# Altium PCB imu_2by2.PcbDoc
Units mil, origin at the board's own origin, x right, y up, seen from the top; angles counter-clockwise.
Board outline 2000 x 2000 mil, 2 copper layers (Top Layer, Bottom Layer); 231 components, 130 nets, 771 pads, 48 vias.
Unrouted connection lines stored in the file: 502.
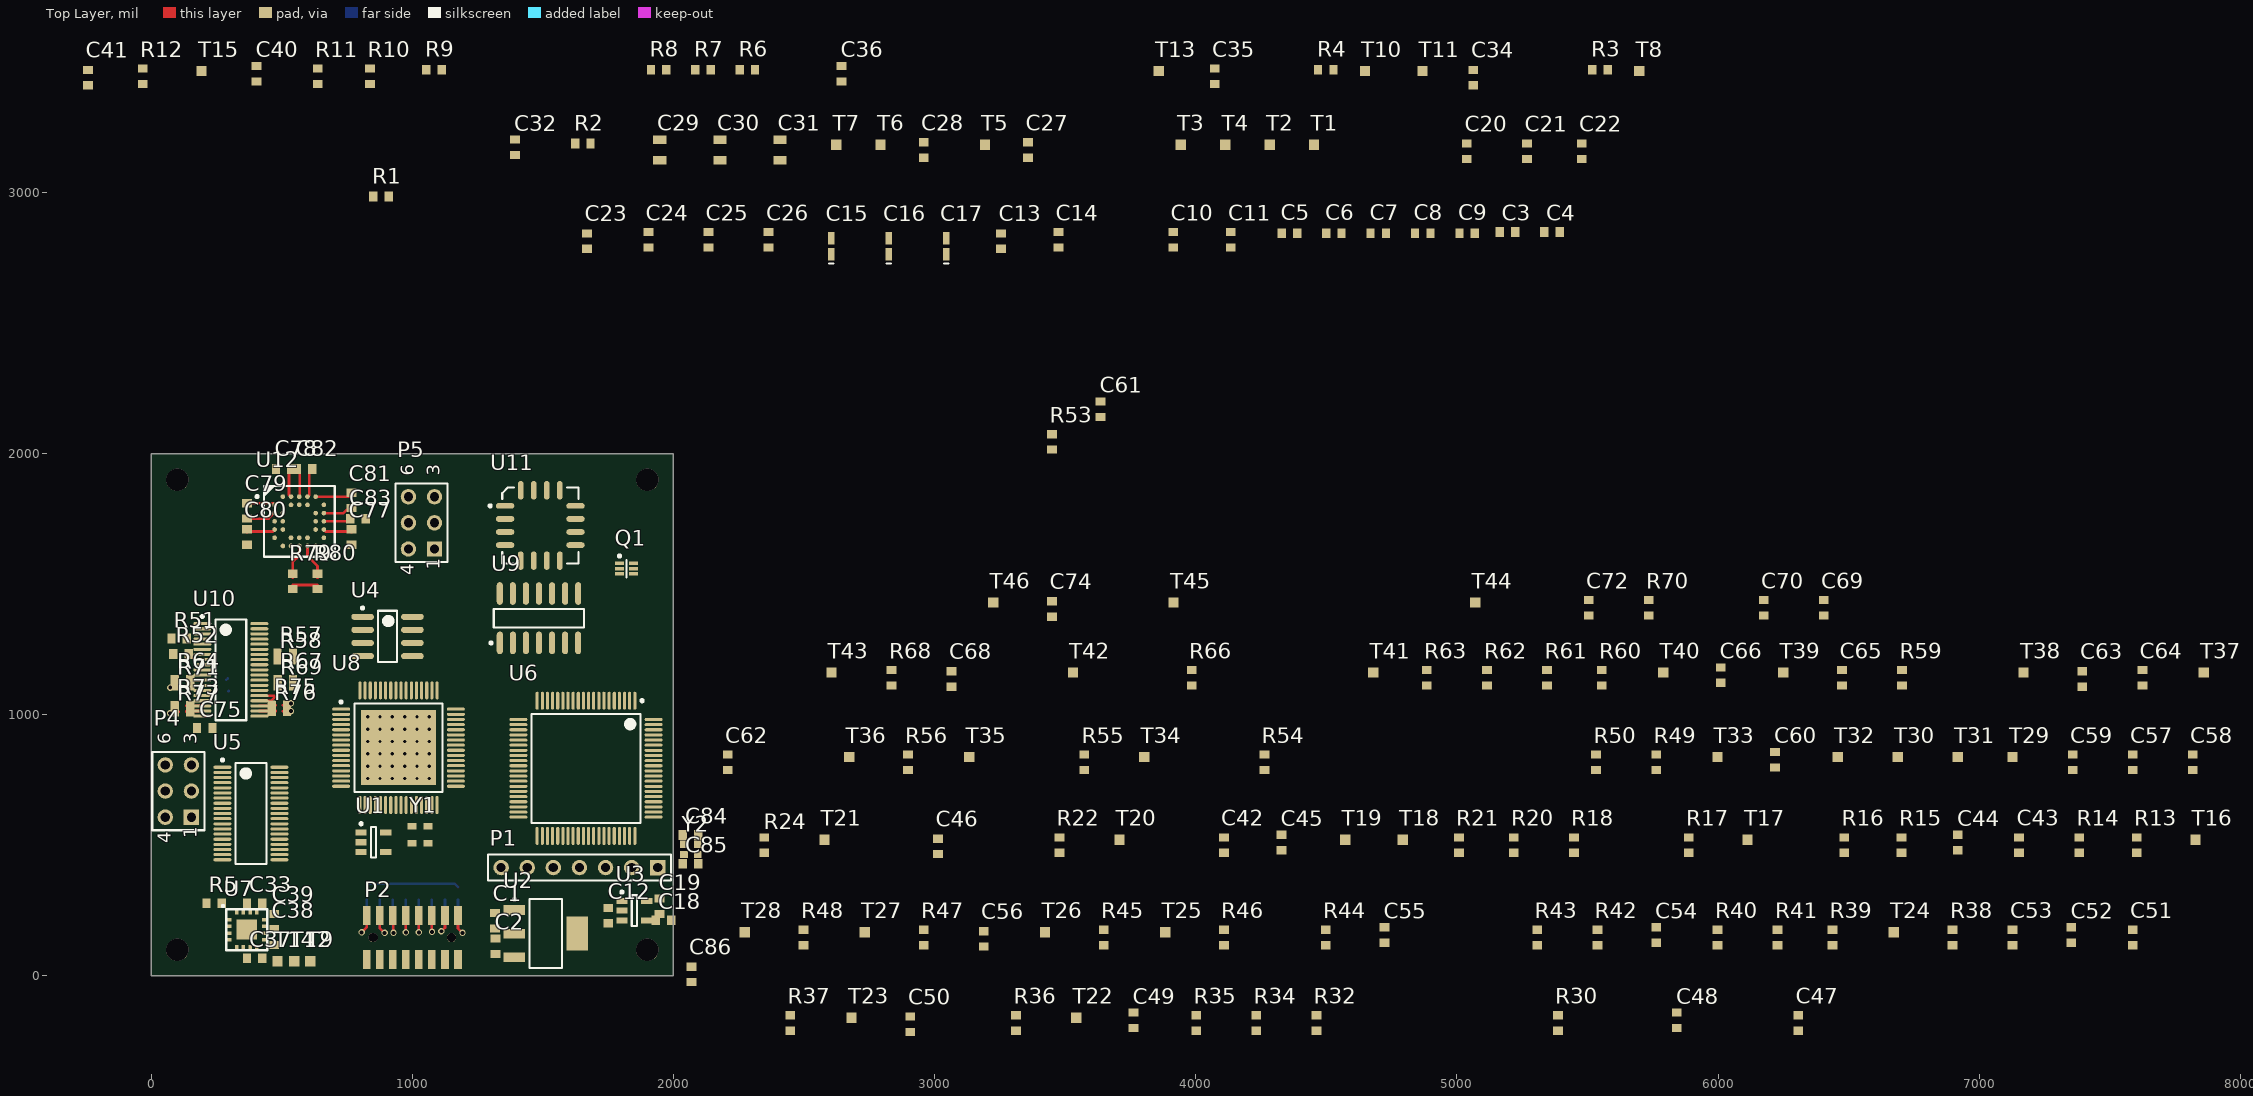
[diagram p0: Top Layer view]
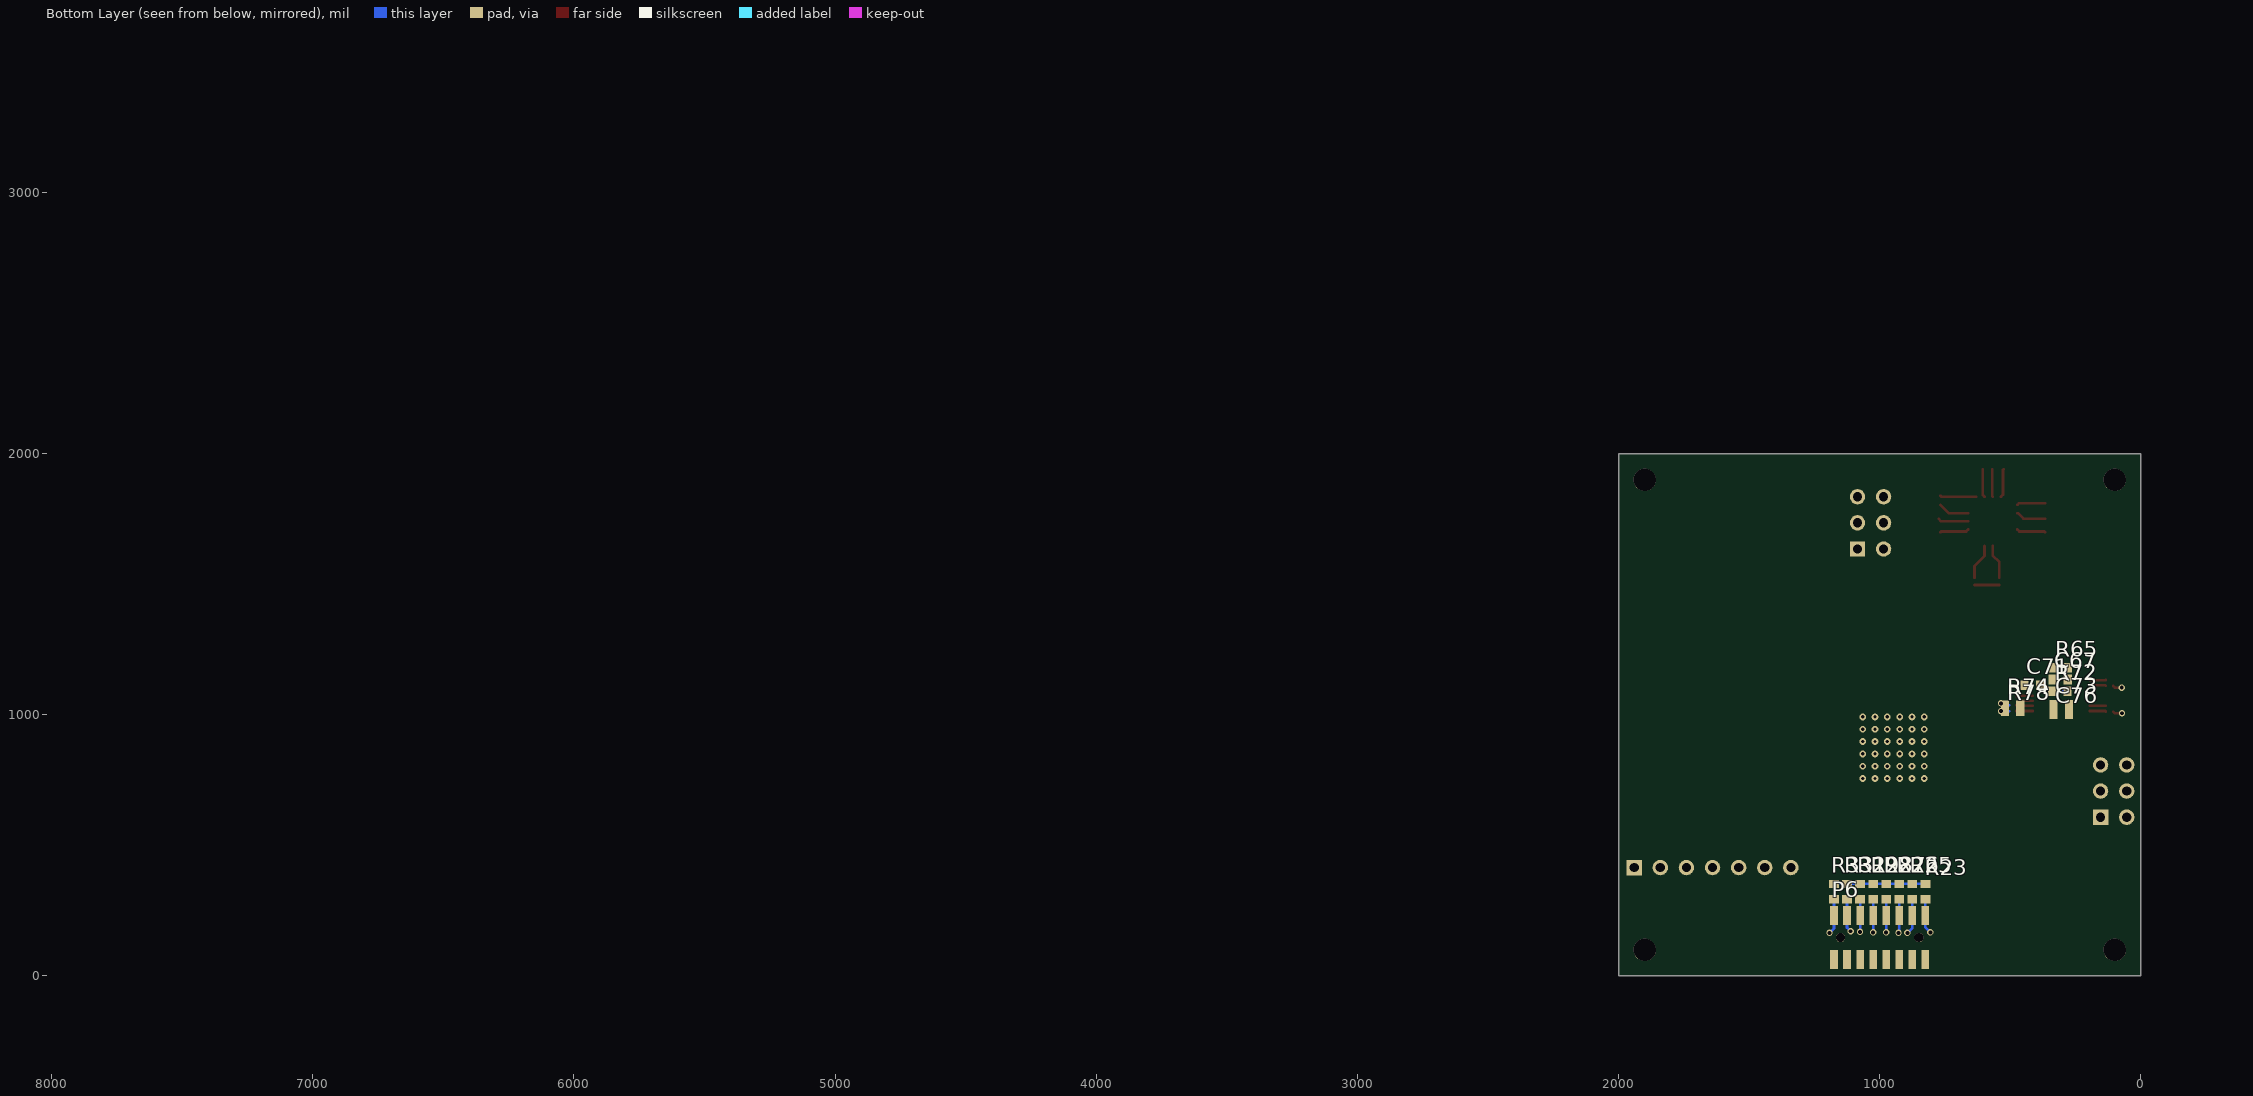
[diagram p1: Bottom Layer view, seen from below]

## Layer stack, top to bottom
Top Layer: signal copper 1.4
Dielectric: dielectric 12.6, FR-4, Dk 4.8
Bottom Layer: signal copper 1.4

## Board outline
0,0 2000,0 2000,2000 0,2000

## Design rules (kind name [scope] priority, off if disabled: settings)
Clearance [All] p1: gap=6
ComponentClearance [All] p1: gap=1 collisioncheckmode=3 verticalgap=100000 showdistances=FALSE
HoleSize [All] p1: absolutevalues=TRUE maxlimit=100 minlimit=15 maxpercent=80.000 minpercent=20.000
MinimumSolderMaskSliver [All] p1: minsoldermaskwidth=0
PolygonConnect [All] p1: connectstyle=Relief reliefconductorwidth=10 reliefentries=4 polygonreliefangle="90 Angle"
RoomDefinition U_gyro [InComponentClass('U_gyro')] p1: confinementstyle=ConfineIn formatcopy=TRUE lockcomponents=FALSE outline 336,1474 841,1474 841,1983 336,1983
RoutingVias [All] p1: holewidth=15 width=24 viastyle="Through Hole" minholewidth=15 minwidth=24 maxholewidth=15 maxwidth=24
SilkToSilkClearance [All] p1: silktosilkclearance=0
SilkscreenOverComponentPads [All] p1: minsilkscreentomaskgap=0
SolderMaskExpansion [All] p1: expansion=-300
Width [All] p1: maxlimit=10 minlimit=6 preferedwidth=8 minimp=50.000000 maximp=50.000000 favimp=50.000000
23 further rules are at their usual default settings.

## Classes and differential pairs
component class U_gyro: C77 C78 C79 C80 C81 C82 C83 R79 R80 U12

## Components (designator, comment, footprint, x,y, rotation, side; value= is the part's Value field where it differs from the comment)
C1 "Capacitor" "0603 (1608)" 1317,211 r270 top
C2 "1uF" "0603 (1608)" 1318,114 r90 top
C3 "1uF" "0603 (1608)" 5194,2849 r0 top
C4 "1uF" "0603 (1608)" 5364,2849 r0 top
C5 "Capacitor" "0603 (1608)" 4359,2844 r0 top
C6 "Capacitor" "0603 (1608)" 4529,2844 r0 top
C7 "Capacitor" "0603 (1608)" 4699,2844 r0 top
C8 "Capacitor" "0603 (1608)" 4869,2844 r0 top
C9 "Capacitor" "0603 (1608)" 5039,2844 r0 top
C10 "Capacitor" "0603 (1608)" 3914,2819 r90 top
C11 "Capacitor" "0603 (1608)" 4134,2819 r90 top
C12 "1uF" "0603 (1608)" 1750,231 r90 top
C13 "Capacitor" "0603 (1608)" 3254,2814 r90 top
C14 "Capacitor" "0603 (1608)" 3474,2819 r90 top
C15 "tant" "CAP-POL 0603(1608)" 2604,2794 r90 top
C16 "tant" "CAP-POL 0603(1608)" 2824,2794 r90 top
C17 "tant" "CAP-POL 0603(1608)" 3044,2794 r90 top
C18 "10nF" "0603 (1608)" 1962,213 r180 top
C19 "1uF" "0603 (1608)" 1947,267 r270 top
C20 "Capacitor" "0603 (1608)" 5038,3158 r90 top
C21 "Capacitor" "0603 (1608)" 5268,3158 r90 top
C22 "Capacitor" "0603 (1608)" 5478,3158 r90 top
C23 "Capacitor" "0603 (1608)" 1669,2814 r90 top
C24 "Capacitor" "0603 (1608)" 1904,2819 r90 top
C25 "Capacitor" "0603 (1608)" 2134,2819 r90 top
C26 "Capacitor" "0603 (1608)" 2364,2819 r90 top
C27 "10nF" "0603 (1608)" 3358,3163 r90 top
C28 "Capacitor" "0603 (1608)" 2958,3163 r90 top
C29 "1.5uF" "0805 (2012)" 1948,3163 r90 top
C30 "1.5uF" "0805 (2012)" 2178,3163 r90 top
C31 "1.5uF" "0805 (2012)" 2408,3163 r90 top
C32 "56nF" "0603 (1608)" 1393,3173 r90 top
C33 "Capacitor" "0603 (1608)" 396,278 r0 top
C34 "Capacitor" "0603 (1608)" 5063,3440 r90 top
C35 "Capacitor" "0603 (1608)" 4073,3445 r90 top
C36 "56nF" "0603 (1608)" 2643,3455 r90 top
C37 "10nF" "0603 (1608)" 396,68 r0 top
C38 "10nF" "0603 (1608)" 471,148 r90 top
C39 "10nF" "0603 (1608)" 471,208 r90 top
C40 "56nF" "0603 (1608)" 403,3455 r90 top
C41 "Capacitor" "0603 (1608)" -242,3440 r90 top
C42 "10nF" "0603 (1608)" 4108,501 r90 top
C43 "Capacitor" "0603 (1608)" 7153,501 r90 top
C44 "56nF" "0603 (1608)" 6918,511 r90 top
C45 "56nF" "0603 (1608)" 4328,511 r90 top
C46 "Capacitor" "0603 (1608)" 3013,496 r90 top
C47 "Capacitor" "0603 (1608)" 6307,-180 r90 top
C48 "56nF" "0603 (1608)" 5842,-170 r90 top
C49 "56nF" "0603 (1608)" 3762,-170 r90 top
C50 "Capacitor" "0603 (1608)" 2907,-185 r90 top
C51 "Capacitor" "0603 (1608)" 7588,147 r90 top
C52 "56nF" "0603 (1608)" 7353,157 r90 top
C53 "1nF" "0603 (1608)" 7128,147 r90 top
C54 "1uF" "0603 (1608)" 5763,157 r90 top
C55 "56nF" "0603 (1608)" 4723,157 r90 top
C56 "Capacitor" "0603 (1608)" 3188,142 r90 top
C57 "Capacitor" "0603 (1608)" 7588,818 r90 top
C58 "1nF" "0603 (1608)" 7818,818 r90 top
C59 "Capacitor" "0603 (1608)" 7358,818 r90 top
C60 "56nF" "0603 (1608)" 6218,828 r90 top
C61 "56nF" "0603 (1608)" 3635,2170 r90 top
C62 "1nF" "0603 (1608)" 2208,818 r90 top
C63 "Capacitor" "0603 (1608)" 7395,1137 r90 top
C64 "Capacitor" "0603 (1608)" 7625,1142 r90 top
C65 "Capacitor" "0603 (1608)" 6475,1142 r90 top
C66 "56nF" "0603 (1608)" 6010,1152 r90 top
C67 "56nF" "0603 (1608)" 309,1135 r0 bottom
C68 "Capacitor" "0603 (1608)" 3065,1137 r90 top
C69 "Capacitor" "0603 (1608)" 6405,1410 r90 top
C70 "Capacitor" "0603 (1608)" 6175,1410 r90 top
C71 "56nF" "0603 (1608)" 416,1113 r0 bottom
C72 "Capacitor" "0603 (1608)" 5505,1410 r90 top
C73 "56nF" "0603 (1608)" 305,1038 r0 bottom
C74 "Capacitor" "0603 (1608)" 3450,1405 r90 top
C75 "Capacitor" "0603 (1608)" 205,949 r0 top
C76 "56nF" "0603 (1608)" 305,1002 r0 bottom
C77 "Capacitor" "0603 (1608)" 767,1681 r270 top
C78 "Capacitor" "0603 (1608)" 507,1941 r180 top
C79 "Capacitor" "0603 (1608)" 367,1781 r90 top
C80 "Capacitor" "0603 (1608)" 367,1681 r270 top
C81 "Capacitor" "0603 (1608)" 767,1821 r270 top
C82 "Capacitor" "0603 (1608)" 587,1941 r0 top
C83 "Capacitor" "0603 (1608)" 792,1751 r0 top
C84 "6pF" "0603 (1608)" 2065,540 r0 top
C85 "6pF" "0603 (1608)" 2065,430 r180 top
C86 "Capacitor" "0603 (1608)" 2069,6 r90 top
P1 "Header 7" HDR1X7 1940,415 r180 top
P2 "2x8smd0.5male" S9007E-08-ND 1000,147 r0 top locked
P4 "Header 3X2A" HDR2X3_CEN 154,608 r90 top
P5 "Header 3X2A" HDR2X3_CEN 1085,1635 r90 top
P6 "2x8smd0.5female" S9007E-08-ND 1000,147 r0 bottom locked
Q1 "MOSFET N CH" SOT563F 1820,1560 r0 top
R1 "1K 1%" "0603 (1608)" 880,2985 r0 top
R2 "1K 1%" "0603 (1608)" 1653,3188 r0 top
R3 "1K 1%" "0603 (1608)" 5548,3470 r0 top
R4 "1K 1%" "0603 (1608)" 4498,3470 r0 top
R5 "ST Jumper" "0603 (1608)" 241,278 r180 top
R6 "1K 1%" "0603 (1608)" 2283,3470 r0 top
R7 "1K 1%" "0603 (1608)" 2113,3470 r0 top
R8 "1K" "0603 (1608)" 1943,3470 r0 top
R9 "1K 1%" "0603 (1608)" 1083,3470 r0 top
R10 "1K 1%" "0603 (1608)" 838,3445 r90 top
R11 "1K" "0603 (1608)" 638,3445 r90 top
R12 "1K 1%" "0603 (1608)" -32,3445 r90 top
R13 "1K 1%" "0603 (1608)" 7603,501 r90 top
R14 "1K" "0603 (1608)" 7383,501 r90 top
R15 "1K" "0603 (1608)" 6703,501 r90 top
R16 "1K 1%" "0603 (1608)" 6483,501 r90 top
R17 "1K" "0603 (1608)" 5888,501 r90 top
R18 "1K 1%" "0603 (1608)" 5448,501 r90 top
R20 "1K 1%" "0603 (1608)" 5218,501 r90 top
R21 "1K 1%" "0603 (1608)" 5008,501 r90 top
R22 "1K 1%" "0603 (1608)" 3478,501 r90 top
R23 "Res1" "0603 (1608)" 825,323 r90 bottom
R24 "1K 1%" "0603 (1608)" 2348,501 r90 top
R25 "Res1" "0603 (1608)" 875,323 r90 bottom
R26 "Res1" "0603 (1608)" 925,323 r90 bottom
R27 "Res1" "0603 (1608)" 975,323 r90 bottom
R28 "Res1" "0603 (1608)" 1025,323 r90 bottom
R29 "Res1" "0603 (1608)" 1075,323 r90 bottom
R30 "1K 1%" "0603 (1608)" 5387,-180 r90 top
R31 "Res1" "0603 (1608)" 1125,323 r90 bottom
R32 "1K 1%" "0603 (1608)" 4462,-180 r90 top
R33 "Res1" "0603 (1608)" 1175,323 r90 bottom
R34 "1K 1%" "0603 (1608)" 4232,-180 r90 top
R35 "1K 1%" "0603 (1608)" 4002,-180 r90 top
R36 "1K 1%" "0603 (1608)" 3312,-180 r90 top
R37 "1K 1%" "0603 (1608)" 2447,-180 r90 top
R38 "1K 1%" "0603 (1608)" 6898,147 r90 top
R39 "200" "0603 (1608)" 6438,147 r90 top
R40 "1K 1%" "0603 (1608)" 5998,147 r90 top
R41 "499K 1%" "0603 (1608)" 6228,147 r90 top
R42 "1K 1%" "0603 (1608)" 5538,147 r90 top
R43 "1K 1%" "0603 (1608)" 5308,147 r90 top
R44 "Res1" "0603 (1608)" 4498,147 r90 top
R45 "1K 1%" "0603 (1608)" 3648,147 r90 top
R46 "Res1" "0603 (1608)" 4108,147 r90 top
R47 "499K 1%" "0603 (1608)" 2958,147 r90 top
R48 "1K 1%" "0603 (1608)" 2498,147 r90 top
R49 "499K 1%" "0603 (1608)" 5763,818 r90 top
R50 "1K 1%" "0603 (1608)" 5533,818 r90 top
R51 "1K 1%" "0603 (1608)" 107,1292 r180 top
R52 "1K 1%" "0603 (1608)" 114,1233 r0 top
R53 "1K 1%" "0603 (1608)" 3450,2045 r90 top
R54 "Res1" "0603 (1608)" 4263,818 r90 top
R55 "Res1" "0603 (1608)" 3573,818 r90 top
R56 "499K 1%" "0603 (1608)" 2898,818 r90 top
R57 "1K 1%" "0603 (1608)" 513,1235 r0 top
R58 "1K 1%" "0603 (1608)" 513,1212 r0 top
R59 "499K 1%" "0603 (1608)" 6705,1142 r90 top
R60 "1K 1%" "0603 (1608)" 5555,1142 r90 top
R61 "Res1" "0603 (1608)" 5345,1142 r90 top
R62 "1K 1%" "0603 (1608)" 5115,1142 r90 top
R63 "Res1" "0603 (1608)" 4885,1142 r90 top
R64 "1K 1%" "0603 (1608)" 120,1134 r0 top
R65 "1K 1%" "0603 (1608)" 308,1180 r0 bottom
R66 "499K 1%" "0603 (1608)" 3985,1142 r90 top
R67 "1K 1%" "0603 (1608)" 514,1134 r0 top
R68 "Res1" "0603 (1608)" 2835,1142 r90 top
R69 "1K 1%" "0603 (1608)" 514,1111 r0 top
R70 "Res1" "0603 (1608)" 5735,1410 r90 top
R71 "1K 1%" "0603 (1608)" 120,1111 r0 top
R72 "1K 1%" "0603 (1608)" 310,1090 r0 bottom
R73 "1K 1%" "0603 (1608)" 120,1035 r0 top
R74 "1K 1%" "0603 (1608)" 491,1037 r0 bottom
R75 "1K 1%" "0603 (1608)" 491,1037 r0 top
R76 "1K 1%" "0603 (1608)" 491,1014 r0 top
R77 "1K 1%" "0603 (1608)" 120,1012 r0 top
R78 "1K 1%" "0603 (1608)" 491,1014 r0 bottom
R79 "ST Jumper" "0603 (1608)" 542,1511 r270 top
R80 "ST Jumper" "0603 (1608)" 637,1511 r270 top
T1 "TEST_PAD" TEST_PAD 4453,3183 r0 top
T2 "TEST_PAD" TEST_PAD 4283,3183 r0 top
T3 "TEST_PAD" TEST_PAD 3943,3183 r0 top
T4 "VOCM" TEST_PAD 4113,3183 r0 top
T5 "TEST_PAD" TEST_PAD 3193,3183 r0 top
T6 "TEST_PAD" TEST_PAD 2793,3183 r0 top
T7 "TEST_PAD" TEST_PAD 2623,3183 r0 top
T8 "VOCM" TEST_PAD 5698,3465 r0 top
T9 "VOCM" TEST_PAD 609,56 r0 top
T10 "VOCM" TEST_PAD 4648,3465 r90 top
T11 "VOCM" TEST_PAD 4868,3465 r90 top
T12 "VOCM" TEST_PAD 548,56 r90 top
T13 "VOCM" TEST_PAD 3858,3465 r90 top
T14 "VOCM" TEST_PAD 484,56 r90 top
T15 "VOCM" TEST_PAD 193,3465 r90 top
T16 "VOCM" TEST_PAD 7828,521 r90 top
T17 "VOCM" TEST_PAD 6113,521 r90 top
T18 "VOCM" TEST_PAD 4793,521 r90 top
T19 "VOCM" TEST_PAD 4573,521 r90 top
T20 "VOCM" TEST_PAD 3708,521 r90 top
T21 "VOCM" TEST_PAD 2578,521 r90 top
T22 "VOCM" TEST_PAD 3542,-160 r90 top
T23 "VOCM" TEST_PAD 2682,-160 r90 top
T24 "VOCM" TEST_PAD 6673,167 r90 top
T25 "VOCM" TEST_PAD 3883,167 r90 top
T26 "VOCM" TEST_PAD 3423,167 r90 top
T27 "VOCM" TEST_PAD 2733,167 r90 top
T28 "VOCM" TEST_PAD 2273,167 r90 top
T29 "VOCM" TEST_PAD 7128,838 r90 top
T30 "VOCM" TEST_PAD 6688,838 r90 top
T31 "VOCM" TEST_PAD 6918,838 r90 top
T32 "VOCM" TEST_PAD 6458,838 r90 top
T33 "VOCM" TEST_PAD 5998,838 r90 top
T34 "VOCM" TEST_PAD 3803,838 r90 top
T35 "VOCM" TEST_PAD 3133,838 r90 top
T36 "VOCM" TEST_PAD 2673,838 r90 top
T37 "VOCM" TEST_PAD 7860,1162 r90 top
T38 "VOCM" TEST_PAD 7170,1162 r90 top
T39 "VOCM" TEST_PAD 6250,1162 r90 top
T40 "VOCM" TEST_PAD 5790,1162 r90 top
T41 "VOCM" TEST_PAD 4680,1162 r90 top
T42 "VOCM" TEST_PAD 3530,1162 r90 top
T43 "VOCM" TEST_PAD 2605,1162 r90 top
T44 "VOCM" TEST_PAD 5070,1430 r90 top
T45 "VOCM" TEST_PAD 3915,1430 r90 top
T46 "VOCM" TEST_PAD 3225,1430 r90 top
U1 "TLV70018" SOT23-5 851,512 r0 top
U2 "UA78M05CDCYR (5V Reg)" "SOT233 (Ti voltage reg)" 1511,162 r0 top
U3 "TPS73033DBVR (3V Reg)" "SOT23-5 (Ti 3.3V Reg)" 1850,250 r0 top
U4 "OPA350" MSOP-8 905,1300 r0 top
U5 "THS4524" TSSOP-38 382,622 r0 top
U6 "TMS320F28035" TS-PQFP-G80 1665,795 r270 top
U7 "ADXL325" LFCSP_LQ_AXDL 366,177 r0 top
U8 "ADS1178/1278" S-PQFP-G64 947,874 r0 top
U9 "LMV324M" M14A_N 1485,1370 r90 top
U10 "THS4524" TSSOP-38 305,1172 r0 top
U11 "HMC1053" LCC-16 1490,1725 r0 top
U12 "ADXRS620" BGA_AXDR 567,1741 r0 top
Y1 "OSCILLATOR" "ABRACON Oscillator" 1060,508 r90 top
Y2 "XTAL" "Murata XTAL" 2040,465 r0 top

## Footprints (in the part's own frame and the unit in brackets; to place one, negate y for a bottom-side part, rotate by r counter-clockwise, add the part's x,y. Pads: shape width x height; smd on the part's side, far side on the other; paste and mask are expansions set on the pad)
"0603 (1608)" [mm] "Chip 2-Leads 0603 (1608)"
  rect 0.8x0.95 smd mask+0: 1(-0.75,0) 2(0.75,0)
  body extent -0.77,-0.43 0.77,0.43, height 0.55
"0805 (2012)" [mm] "Chip 2-Leads, IPC Medium Density (2012)"
  rect 0.8x1.3 smd mask+0: 1(-1,0) 2(1,0)
  body extent -1.05,-0.63 1.05,0.63, height 0.5
"ABRACON Oscillator" [mm]
  rect 0.65x0.85 smd: 1(0,0) 2(1.65,0) 3(1.65,1.55) 4(0,1.55)
  body extent -0.48,-0.36 2.2,1.91, height 0.85
BGA_AXDR [mm] "From AXDRS622 Datasheet"
  round 0.45 smd: A2(-1.6,2.4) A3(-0.8,2.4) A4(0,2.4) A5(0.8,2.4) A6(1.6,2.4) B1(-2.4,1.6) B3(-0.8,1.6) B4(0,1.6) B5(0.8,1.6) B7(2.4,1.6) C1(-2.4,0.8) C2(-1.6,0.8) C6(1.6,0.8) C7(2.4,0.8) D1(-2.4,0) D2(-1.6,0) D6(1.6,0) D7(2.4,0) E1(-2.4,-0.8) E2(-1.6,-0.8) E6(1.6,-0.8) E7(2.4,-0.8) F1(-2.4,-1.6) F3(-0.8,-1.6) F4(0,-1.6) F5(0.8,-1.6) F7(2.4,-1.6) G2(-1.6,-2.4) G3(-0.8,-2.4) G4(0,-2.4) G5(0.8,-2.4) G6(1.6,-2.4)
  silkscreen extent -4.22,-3.45 3.45,3.45, body extent -3.45,-3.45 3.45,3.45, height 3.8
"CAP-POL 0603(1608)" [mm] "Molded Capacitor, 2-Leads, Body 1.6x0.8mm, IPC Medium Density"
  rect 1.2x0.65 smd: 1(-0.775,0) 2(0.775,0)
  silkscreen extent -1.68,-0.22 -1.68,0.23, body extent -0.85,-0.48 0.85,0.48, height 0.9
HDR1X7 [mm] "Connector; Header; 7 Position"
  rect 1.5x1.5 hole 0.9: 1(0,0)
  round 1.5 hole 0.9: 2(2.54,0) 3(5.08,0) 4(7.62,0) 5(10.16,0) 6(12.7,0) 7(15.24,0)
  silkscreen extent -1.27,-1.27 16.51,1.27
HDR2X3_CEN [mm] "Connector; Header; 3x2 Position"
  rect 1.5x1.5 hole 0.9: 1(0,0)
  round 1.5 hole 0.9: 2(2.54,0) 3(5.08,0) 4(0,2.54) 5(2.54,2.54) 6(5.08,2.54)
  silkscreen extent -1.27,-1.27 6.35,3.81
LCC-16 [mm] "HCM1053"
  oval 1.8x0.55 smd: 1(-3.425,1.905) 2(-3.425,0.635) 3(-3.425,-0.635) 4(-3.425,-1.905) 9(3.425,-1.905) 10(3.425,-0.635) 11(3.425,0.635) 12(3.425,1.905)
  oval 0.55x1.8 smd: 5(-1.905,-3.425) 6(-0.635,-3.425) 7(0.635,-3.425) 8(1.905,-3.425) 13(1.905,3.425) 14(0.635,3.425) 15(-0.635,3.425) 16(-1.905,3.425)
  silkscreen extent -5,-3.7 3.7,3.7, body extent -3.68,-3.69 3.69,3.68, height 2.8
LFCSP_LQ_AXDL [mm] "checked for adxl325"
  rect 0.5x0.35 smd mask+0.102: 1(-1.75,0.975) 2(-1.75,0.325) 3(-1.75,-0.325) 4(-1.75,-0.975) 9(1.75,-0.975) 10(1.75,-0.325) 11(1.75,0.325) 12(1.75,0.975)
  rect 0.35x0.5 smd mask+0.102: 5(-0.975,-1.75) 6(-0.325,-1.75) 7(0.325,-1.75) 8(0.975,-1.75) 13(0.975,1.75) 14(0.325,1.75) 15(-0.325,1.75) 16(-0.975,1.75)
  rect 1.95x1.95 smd: PAD(0,0)
  silkscreen extent -2.37,-2 2,2.37
M14A_N [mm] "SOIC, 14-Leads, Body 8.6x3.9mm, Pitch 1.27mm, IPC Medium Density"
  oval 2.2x0.6 smd: 1(-2.4,3.81) 2(-2.4,2.54) 3(-2.4,1.27) 4(-2.4,0) 5(-2.4,-1.27) 6(-2.4,-2.54) 7(-2.4,-3.81) 8(2.4,-3.81) 9(2.4,-2.54) 10(2.4,-1.27) 11(2.4,0) 12(2.4,1.27) 13(2.4,2.54) 14(2.4,3.81)
  silkscreen extent -2.52,-4.4 0.9,4.78, body extent -2,-4.38 2,4.38, height 1.75
MSOP-8 [mm] "MSOP-8 From OPA350 datasheet"
  oval 2.2x0.6 smd: 1(-2.425,1.905) 2(-2.425,0.635) 3(-2.425,-0.635) 4(-2.425,-1.905) 5(2.425,-1.905) 6(2.425,-0.635) 7(2.425,0.635) 8(2.425,1.905)
  silkscreen extent -2.55,-2.5 0.93,2.88, body extent -2,-2.5 2,2.5, height 1.75
"Murata XTAL" [mm] "490-5588-1-ND"
  rect 0.75x0.7 smd: 1(0,0) 2(0,1) 2(1.35,0) 3(1.35,1)
  body extent -0.33,-0.35 1.67,1.35, height 0.7
S9007E-08-ND [mm] "16 0.05\" smd header - female"
  round 0.9 hole 0.9: 0(-3.81,0) 0(3.81,0)
  rect 0.74x1.85 smd: 1(-4.445,2.125) 2(-4.445,-2.125) 3(-3.175,2.125) 4(-3.175,-2.125) 5(-1.905,2.125) 6(-1.905,-2.125) 7(-0.635,2.125) 8(-0.635,-2.125) 9(0.635,2.125) 10(0.635,-2.125) 11(1.905,2.125) 12(1.905,-2.125) 13(3.175,2.125) 14(3.175,-2.125) 15(4.445,2.125) 16(4.445,-2.125)
S-PQFP-G64 [mm] "ADS1178 Footprint"
  oval 1.75x0.3 smd: 1(-5.575,3.75) 2(-5.575,3.25) 3(-5.575,2.75) 4(-5.575,2.25) 5(-5.575,1.75) 6(-5.575,1.25) 7(-5.575,0.75) 8(-5.575,0.25) 9(-5.575,-0.25) 10(-5.575,-0.75) 11(-5.575,-1.25) 12(-5.575,-1.75) 13(-5.575,-2.25) 14(-5.575,-2.75) 15(-5.575,-3.25) 16(-5.575,-3.75) 33(5.575,-3.75) 34(5.575,-3.25) 35(5.575,-2.75) 36(5.575,-2.25) 37(5.575,-1.75) 38(5.575,-1.25) 39(5.575,-0.75) 40(5.575,-0.25) 41(5.575,0.25) 42(5.575,0.75) 43(5.575,1.25) 44(5.575,1.75) 45(5.575,2.25) 46(5.575,2.75) 47(5.575,3.25) 48(5.575,3.75)
  oval 0.3x1.75 smd: 17(-3.75,-5.575) 18(-3.25,-5.575) 19(-2.75,-5.575) 20(-2.25,-5.575) 21(-1.75,-5.575) 22(-1.25,-5.575) 23(-0.75,-5.575) 24(-0.25,-5.575) 25(0.25,-5.575) 26(0.75,-5.575) 27(1.25,-5.575) 28(1.75,-5.575) 29(2.25,-5.575) 30(2.75,-5.575) 31(3.25,-5.575) 32(3.75,-5.575) 49(3.75,5.575) 50(3.25,5.575) 51(2.75,5.575) 52(2.25,5.575) 53(1.75,5.575) 54(1.25,5.575) 55(0.75,5.575) 56(0.25,5.575) 57(-0.25,5.575) 58(-0.75,5.575) 59(-1.25,5.575) 60(-1.75,5.575) 61(-2.25,5.575) 62(-2.75,5.575) 63(-3.25,5.575) 64(-3.75,5.575)
  rect 7.3x7.3 smd: 65(0,0)
  silkscreen extent -5.7,-4.3 4.3,4.57, body extent -5,-5 5,5, height 1.2
SOT23-5 [mm] "SOT23, 5-Leads, Body 3.0x3.0mm (max), Pitch 0.95mm, IPC Medium Density"
  rect 1.1x0.6 smd: 1(-1.2,0.95) 2(-1.2,0) 3(-1.2,-0.95) 4(1.2,-0.95) 5(1.2,0.95)
  silkscreen extent -1.32,-1.5 0.25,1.92, body extent -0.87,-1.52 0.87,1.53, height 1.1
"SOT23-5 (Ti 3.3V Reg)" [mm] "SOT23, 5-Leads, Body 3.0x3.0mm (max), Pitch 0.95mm, IPC Medium Density"
  rect 1.1x0.6 smd: 1(-1.2,0.95) 2(-1.2,0) 3(-1.2,-0.95) 4(1.2,-0.95) 5(1.2,0.95)
  silkscreen extent -1.32,-1.5 0.25,1.92, body extent -0.87,-1.52 0.87,1.53, height 1.45
"SOT233 (Ti voltage reg)" [mm] "SOT223, 4-Leads, Body 6.7x7.3mm (max), Pitch 2.30mm, IPC Medium Density"
  rect 2.1x0.95 smd: 1(-3.05,2.3) 2(-3.05,0) 3(-3.05,-2.3)
  rect 2.1x3.3 smd: 4(3.05,0)
  silkscreen extent -3.17,-3.35 1.6,3.45, body extent -1.85,-3.35 1.85,3.35, height 1.8
SOT563F [mm] "SOT23, 6-Leads, Body 1.7x1.7mm (max), Pitch 0.50mm, IPC Medium Density"
  rect 0.85x0.35 smd: 1(-0.675,0.5) 2(-0.675,0) 3(-0.675,-0.5) 4(0.675,-0.5) 5(0.675,0) 6(0.675,0.5)
  silkscreen extent -0.8,-0.85 0,1.35, body extent -0.6,-0.85 0.6,0.85, height 0.6
TEST_PAD [mm]
  rect 1x1 smd: 0(0,0)
TS-PQFP-G80 [mm] "TMS320F28035 (80-pin)"
  oval 1.75x0.3 smd: 1(-6.575,4.75) 2(-6.575,4.25) 3(-6.575,3.75) 4(-6.575,3.25) 5(-6.575,2.75) 6(-6.575,2.25) 7(-6.575,1.75) 8(-6.575,1.25) 9(-6.575,0.75) 10(-6.575,0.25) 11(-6.575,-0.25) 12(-6.575,-0.75) 13(-6.575,-1.25) 14(-6.575,-1.75) 15(-6.575,-2.25) 16(-6.575,-2.75) 17(-6.575,-3.25) 18(-6.575,-3.75) 19(-6.575,-4.25) 20(-6.575,-4.75) 41(6.575,-4.75) 42(6.575,-4.25) 43(6.575,-3.75) 44(6.575,-3.25) 45(6.575,-2.75) 46(6.575,-2.25) 47(6.575,-1.75) 48(6.575,-1.25) 49(6.575,-0.75) 50(6.575,-0.25) 51(6.575,0.25) 52(6.575,0.75) 53(6.575,1.25) 54(6.575,1.75) 55(6.575,2.25) 56(6.575,2.75) 57(6.575,3.25) 58(6.575,3.75) 59(6.575,4.25) 60(6.575,4.75)
  oval 0.3x1.75 smd: 21(-4.75,-6.575) 22(-4.25,-6.575) 23(-3.75,-6.575) 24(-3.25,-6.575) 25(-2.75,-6.575) 26(-2.25,-6.575) 27(-1.75,-6.575) 28(-1.25,-6.575) 29(-0.75,-6.575) 30(-0.25,-6.575) 31(0.25,-6.575) 32(0.75,-6.575) 33(1.25,-6.575) 34(1.75,-6.575) 35(2.25,-6.575) 36(2.75,-6.575) 37(3.25,-6.575) 38(3.75,-6.575) 39(4.25,-6.575) 40(4.75,-6.575) 61(4.75,6.575) 62(4.25,6.575) 63(3.75,6.575) 64(3.25,6.575) 65(2.75,6.575) 66(2.25,6.575) 67(1.75,6.575) 68(1.25,6.575) 69(0.75,6.575) 70(0.25,6.575) 71(-0.25,6.575) 72(-0.75,6.575) 73(-1.25,6.575) 74(-1.75,6.575) 75(-2.25,6.575) 76(-2.75,6.575) 77(-3.25,6.575) 78(-3.75,6.575) 79(-4.25,6.575) 80(-4.75,6.575)
  silkscreen extent -6.7,-5.3 5.3,5.58, body extent -6,-6 6,6, height 1.6
TSSOP-38 [mm] "THS4524"
  oval 1.75x0.3 smd: 1(-2.775,4.5) 2(-2.775,4) 3(-2.775,3.5) 4(-2.775,3) 5(-2.775,2.5) 6(-2.775,2) 7(-2.775,1.5) 8(-2.775,1) 9(-2.775,0.5) 10(-2.775,0) 11(-2.775,-0.5) 12(-2.775,-1) 13(-2.775,-1.5) 14(-2.775,-2) 15(-2.775,-2.5) 16(-2.775,-3) 17(-2.775,-3.5) 18(-2.775,-4) 19(-2.775,-4.5) 20(2.775,-4.5) 21(2.775,-4) 22(2.775,-3.5) 23(2.775,-3) 24(2.775,-2.5) 25(2.775,-2) 26(2.775,-1.5) 27(2.775,-1) 28(2.775,-0.5) 29(2.775,0) 30(2.775,0.5) 31(2.775,1) 32(2.775,1.5) 33(2.775,2) 34(2.775,2.5) 35(2.775,3) 36(2.775,3.5) 37(2.775,4) 38(2.775,4.5)
  silkscreen extent -2.9,-4.9 1.5,5.32, body extent -2.15,-4.9 2.15,4.9, height 1.2

## Part data
C2 C3 C4 C12 C18 C19 C27 C29 C30 C31 C32 C36 C37 C38 C39 C40 C42 C44 C45 C48 C49 C52 C53 C54 C55 C58 C60 C61 C62 C66 C67 C71 C73 C76 C84 C85: library part Capacitor
C15 C16 C17: library part "Cap Pol3", "Polarized Capacitor (Surface Mount)"
C34 C41 C46 C50 C56 C63 C68 C74 C86: "COG Ceramic Cap -> near input to ads1178"
P1: "Header, 7-Pin"
P4 P5: "Header, 3-Pin, Dual row"
Q1: library part MOSFETs
R1 R2 R3 R4 R5 R6 R7 R8 R9 R10 R11 R12 R13 R14 R15 R16 R17 R18 R20 R21 R22 R24 R30 R32 R34 R35 R36 R37 R38 R39 R40 R41 R42 R43 R45 R47 R48 R49 R50 R51 R52 R53 R56 R57 R58 R59 R60 R62 R64 R65 R66 R67 R69 R71 R72 R73 R74 R75 R76 R77 R78 R79 R80: library part Res1, "Resistor"
R23 R25 R26 R27 R28 R29 R31 R33 R44 R46 R54 R55 R61 R63 R68 R70: "Resistor"
T4 T8 T9 T10 T11 T12 T13 T14 T15 T16 T17 T18 T19 T20 T21 T22 T23 T24 T25 T26 T27 T28 T29 T30 T31 T32 T33 T34 T35 T36 T37 T38 T39 T40 T41 T42 T43 T44 T45 T46: library part TEST_PAD
U6: library part "TMS320F28035 (80-pin)", "80-pin"
U8: library part ADS1178, "The ADS1178 and 1278 are pin compatible. 16 and 24 bits, respectively."
U9: "General Purpose, Low Voltage, Rail-to-Rail Output Operational Amplifiers"

## Free pads (board coordinates)
  round 86 hole 86: 1(100,100) 2(1900,100) 3(1900,1900) 4(100,1900)

## Via types
v1: diameter 25.98, hole 12.99, Top Layer to Bottom Layer, tented top, 36 vias
v2: diameter 24, hole 15, Top Layer to Bottom Layer, 12 vias

## Nets (pads, with @x,y where several pads share a name; then routed paths per layer and width w, separated by ;. In a path a pad name is that pad's centre, name@x,y a point inside that pad or via, vN(x,y) a via of type N, cw(c..) or ccw(c..) an arc to the next point about the centre after c; other vN are vias at no path point)
1.8V: C4.1 C9.1 C17.1 U1.5 U8.26
3.3V: C3.1 C10.1 C11.1 C13.2 C15.1 C19.1 C20.2 C21.2 C33.1 C42.2 C64.1 C70.1 P1.7 R5.1 R39.1 R68.2 T6.0 U1.1 U1.3 U3.5 U6.20 U6.36 U6.70 U7.14 U7.15 U8.22 U8.23 U8.32 U8.35 U8.36 U8.37 U8.38 U8.39 U8.40 U8.41 U8.42 U9.4 U11.1 Y1.1 Y1.4
5V: C2.1 C5.1 C6.1 C7.1 C8.1 C12.1 C14.1 C16.1 C22.1 C23.1 C24.1 C25.1 C26.1 C27.2 C77.1 C78.1 C80.1 P4.2 P5.2 R79.2 R80.2 T2.0 U2.3 U3.1 U3.3 U4.7 U5.1 U5.6 U5.11 U5.16 U5.20 U5.25 U5.30 U5.35 U8.5 U8.44 U8.53 U8.60 U10.1 U10.6 U10.11 U10.16 U10.20 U10.25 U10.30 U10.35 U12.A3 U12.E1 U12.E7 | length 424.9
  Top Layer w10: C80.1@367,1698.72 370.15,1701.87 464.87,1701.87 U12.E1 ; C78.1@524.72,1941 527.87,1937.85 527.87,1843.13 U12.A3 ; R79.2@542,1497.22 R80.2@637,1497.22 ; U12.E7 669.13,1701.87 763.85,1701.87 C77.1@767,1698.72
ADC_DRDY: T19.0 U6.78 U8.29
ADC_MD: T17.0 U6.65 U8.34
ADC_SYNC: T18.0 U6.79 U8.11
AGND: C5.2 C6.2 C7.2 C8.2 C14.2 C16.2 C21.1 C22.2 C23.2 C24.2 C25.2 C26.2 C27.1 C28.2 C33.2 C35.2 C37.1 C38.1 C39.1 C43.2 C47.2 C51.2 C59.2 C64.2 C65.2 C69.2 C70.2 C72.2 C75.2 C77.2 C78.2 C80.2 C83.2 C86.1 P4.3 P5.3 R6.1 R8.1 R11.1 R14.1 R15.1 R16.1 R17.1 R30.1 R38.1 R50.1 R60.1 R70.1 R71.1 R77.1 U4.4 U5.5 U5.10 U5.15 U5.23 U5.24 U5.28 U5.29 U5.33 U5.34 U5.38 U6.11 U6.13 U6.15 U6.21 U6.22 U6.23 U6.24 U6.26 U6.28 U6.30 U7.3 U7.5 U7.6 U7.7 U8.6 U8.43 U8.54 U8.57 U8.58 U8.59 U9.11 U10.5 U10.10 U10.15 U10.23 U10.24 U10.28 U10.29 U10.33 U10.34 U10.38 U11.5 U11.11 U11.14 U12.F7 U12.G2 | length 202.5
  Top Layer w10: v2(72,1006) 100.22,1006 106.22,1012 ; v2(73,1104) 99.22,1104 106.22,1111 ; U10.23 459.89,1053.89 475,1069 470.43,1073.57 U10.24
CLK_A: T11.0 U6.41 U8.28
DGND: C1.2 C2.2 C3.2 C4.2 C9.2 C10.2 C11.2 C12.2 C13.1 C15.2 C17.2 C18.1 C19.2 C20.1 C29.1 C30.1 C31.1 C42.1 C54.1 C84.1 C85.1 P1.1 Q1.3 U1.2 U1.4 U2.2 U2.4 U3.2 U6.8 U6.35 U6.53 U6.71 U6.73 U8.7 U8.8 U8.9 U8.10 U8.21 U8.24 U8.25 U8.30 U8.31 U11.8 Y1.2
EN_SIG: P2.8 P6.7
MAG_S/R: Q1.2 Q1.5 T29.0 U6.68
MISO: P2.4 P6.3 U6.76
MISO_A: T13.0 U6.42 U8.20
MOSI: P2.2 P6.1 U6.80
NetC18_2: C18.2 U3.4
NetC28_1: C28.1 U4.3 U8.55
NetC29_2: C29.2 U6.7
NetC30_2: C30.2 U6.54
NetC31_2: C31.2 U6.72
NetC32_1: C32.1 R1.2 R2.1 U5.2
NetC32_2: C32.2 R3.1 U5.37
NetC34_1: C34.1 R2.2 R3.2 T8.0 U8.4
NetC34_2: C34.2 R4.2 R7.2 T10.0 U8.3
NetC35_1: C35.1 C43.1 C47.1 C51.1 C59.1 C65.1 C69.1 C75.1 C86.2 T4.0 U4.2 U4.6 U5.4 U5.9 U5.14 U5.19 U8.56 U10.4 U10.9 U10.14 U10.19
NetC36_1: C36.1 R6.2 R7.1 U5.3
NetC36_2: C36.2 R4.1 U5.36
NetC37_2: C37.2 R20.1 T14.0 U7.8
NetC38_2: C38.2 R9.1 T12.0 U7.10
NetC39_2: C39.2 R1.1 T9.0 U7.12
NetC40_1: C40.1 R9.2 R10.1 U5.7
NetC40_2: C40.2 R12.1 U5.32
NetC41_1: C41.1 R10.2 R12.2 T15.0 U8.2
NetC41_2: C41.2 R13.2 R18.2 T16.0 U8.1
NetC44_1: C44.1 R16.2 R18.1 U5.8
NetC44_2: C44.2 R13.1 U5.31
NetC45_1: C45.1 R20.2 R21.1 U5.12
NetC45_2: C45.2 R22.1 U5.27
NetC46_1: C46.1 R21.2 R22.2 T20.0 U8.64
NetC46_2: C46.2 R24.2 R32.2 T21.0 U8.63
NetC48_1: C48.1 R30.2 R32.1 U5.13
NetC48_2: C48.2 R24.1 U5.26
NetC49_1: C49.1 R34.2 R35.1 U5.17
NetC49_2: C49.2 R36.1 U5.22
NetC50_1: C50.1 R35.2 R36.2 T22.0 U8.62
NetC50_2: C50.2 R37.2 R40.2 T23.0 U8.61
NetC52_1: C52.1 R38.2 R40.1 U5.18
NetC52_2: C52.2 R37.1 U5.21
NetC53_1: C53.1 R41.1 R44.2 U9.2
NetC53_2: C53.2 R41.2 T26.0 U6.16 U9.1
NetC54_2: C54.2 Q1.6 R39.2 T24.0
NetC55_1: C55.1 R42.2 R43.1 U10.2
NetC55_2: C55.2 R45.1 U10.37
NetC56_1: C56.1 R43.2 R45.2 T25.0 U8.52
NetC56_2: C56.2 R48.2 R51.2 T27.0 U8.51
NetC57_1: C57.1 U11.3 U11.6
NetC57_2: C57.2 Q1.1 Q1.4 T30.0
NetC58_1: C58.1 R49.1 R54.2 U9.6
NetC58_2: C58.2 R49.2 T35.0 U6.17 U9.7
NetC60_1: C60.1 R50.2 R51.1 U10.3
NetC60_2: C60.2 R48.1 U10.36
NetC61_1: C61.1 R52.2 R53.1 U10.7
NetC61_2: C61.2 R57.1 U10.32
NetC62_1: C62.1 R59.1 R61.2 U9.9
NetC62_2: C62.2 R59.2 T41.0 U6.18 U9.8
NetC63_1: C63.1 R53.2 R57.2 T36.0 U8.50
NetC63_2: C63.2 R58.2 R62.2 T38.0 U8.49
NetC66_1: C66.1 R60.2 R62.1 U10.8
NetC66_2: C66.2 R58.1 U10.31
NetC67_1: C67.1 R64.2 R65.1 U10.12 | length 72.8
  Top Layer w10: R64.2@133.78,1134 135.15,1132.63 U10.12 U10.12@197.12,1134
  Bottom Layer w10: C67.1@287.32,1134 C67.1@293.22,1139.91
NetC67_2: C67.2 R67.1 U10.27
NetC68_1: C68.1 R65.2 R67.2 T42.0 U8.48
NetC68_2: C68.2 R69.2 R72.2 T43.0 U8.47
NetC71_1: C71.1 R71.2 R72.1 U10.13 | length 64.1
  Top Layer w10: R71.2@133.78,1111 135.72,1112.94 U10.13
  Bottom Layer w10: 296.22,1090 297.19,1090.97
NetC71_2: C71.2 R69.1 U10.26
NetC72_1: C72.1 R68.1 R70.2 U9.12
NetC73_1: C73.1 R73.2 R74.1 U10.17 | length 61.2
  Top Layer w10: R73.2@134.57,1034.2 U10.17
NetC73_2: C73.2 R75.1 U10.22 | length 64.1
  Top Layer w10: U10.22 452.68,1034.2 455.47,1037 477.22,1037
NetC74_1: C74.1 R74.2 R75.2 T45.0 U8.46 | length 66.2
  Top Layer w10: R75.2@504.78,1037 528,1037 v2(535,1044)
  Bottom Layer w10: R74.2@504.78,1037 528,1037 v2(535,1044)
NetC74_2: C74.2 R76.2 R78.2 T46.0 U8.45 | length 60.4
  Top Layer w10: R76.2@504.78,1014 v2(535,1014)
  Bottom Layer w10: R78.2@504.78,1014 v2(535,1014)
NetC76_1: C76.1 R77.2 R78.1 U10.18 | length 63
  Top Layer w10: R77.2@133.78,1012 136.3,1014.52 U10.18
NetC76_2: C76.2 R76.1 U10.21 | length 62.4
  Top Layer w10: U10.21 R76.1@476.7,1014.52
NetC79_1: C79.1 U12.C1 | length 114.2
  Top Layer w10: C79.1 449.24,1751.47 470.27,1772.5 U12.C1
NetC81_1: C81.1 U12.A6 | length 138.3
  Top Layer w10: U12.A6 763.77,1835.49 C81.1@767,1838.72
NetC81_2: C81.2 U12.C7 | length 118.3
  Top Layer w10: U12.C7 736.21,1772.5 C81.2@767,1803.28
NetC82_1: C82.1 U12.A4 | length 106.5
  Top Layer w10: U12.A4 569.28,1837.77 C82.1@569.28,1941
NetC82_2: C82.2 U12.A5 | length 108.1
  Top Layer w10: U12.A5 604.72,1841.71 C82.2@604.72,1941
NetC83_1: C83.1 U12.D7 | length 116.9
  Top Layer w10: U12.D7 764.28,1741 C83.1@774.28,1751
NetC84_2: C84.2 U6.52 Y2.3
NetC85_2: C85.2 U6.51 Y2.1
NetP1_2: P1.2 U6.60
NetP1_3: P1.3 U6.59
NetP1_4: P1.4 U6.58
NetP1_5: P1.5 U6.57
NetP1_6: P1.6 U6.10
NetP2_1: P2.1 P6.2 R23.1 | length 204.9
  Top Layer w10: v2(806,167) 825,186 P2.1
  Bottom Layer w10: v2(806,167) 825,186 P6.2 R23.1@825,292.49
NetP2_3: P2.3 P6.4 R25.1 | length 208.9
  Top Layer w10: P2.3 875,184 v2(894,165)
  Bottom Layer w10: R25.1@875,292.49 P6.4 875,184 v2(894,165)
NetP2_5: P2.5 P6.6 R26.1 | length 193.4
  Top Layer w10: P2.5@927,228.66 927,165 v2(928,165)
  Bottom Layer w10: R26.1@925,292.49 P6.6 925,168 v2(928,165)
NetP2_7: P2.7 P6.8 R27.1 | length 189.1
  Top Layer w10: v2(975,167) P2.7
  Bottom Layer w10: v2(975,167) P6.8 R27.1@975,292.49
NetP2_9: P2.9 P6.10 R28.1 | length 189.1
  Top Layer w10: v2(1025,167) P2.9
  Bottom Layer w10: v2(1025,167) P6.10 R28.1@1025,292.49
NetP2_11: P2.11 P6.12 R29.1 | length 185.1
  Top Layer w10: v2(1075,169) P2.11
  Bottom Layer w10: v2(1075,169) P6.12 R29.1@1075,292.49
NetP2_13: P2.13 P6.14 R31.1 | length 192.7
  Top Layer w10: v2(1111,171) 1125,185 P2.13
  Bottom Layer w10: v2(1111,171) 1125,185 P6.14 R31.1@1125,292.49
NetP2_15: P2.15 P6.16 R33.1 | length 207.2
  Top Layer w10: P2.15 1175,182 v2(1192,165)
  Bottom Layer w10: R33.1@1175,292.49 P6.16 1175,182 v2(1192,165)
NetR5_2: R5.2 U7.2
NetR8_2: R8.2 U6.12
NetR11_2: R11.2 U6.14
NetR14_2: R14.2 U6.29
NetR15_2: R15.2 U6.27
NetR17_2: R17.2 U6.25
NetR44_1: R44.1 T32.0 U11.16
NetR46_1: R46.1 T31.0 U11.10
NetR46_2: R46.2 R47.2 U9.3
NetR54_1: R54.1 T34.0 U11.12
NetR55_1: R55.1 T37.0 U11.4
NetR55_2: R55.2 R56.2 U9.5
NetR61_1: R61.1 T39.0 U11.13
NetR63_1: R63.1 T40.0 U11.9
NetR63_2: R63.2 R66.2 U9.10
NetR79_1: R79.1 U12.G4 | length 132.1
  Top Layer w10: 542,1524.78 R79.1 542,1585 567,1610 U12.G4
NetR80_1: R80.1 U12.G5 | length 137.7
  Top Layer w10: U12.G5 598.5,1608.5 637,1570 R80.1 637,1524.78
NetU8_27: U8.27 Y1.3
SCK: P2.6 P6.5 U6.77
SS: R23.2 R25.2 R26.2 R27.2 R28.2 R29.2 R31.2 R33.2 U6.75 | length 355.3
  Bottom Layer w10: R23.2@825,353.51 1162.2,353.51 R33.2@1175,340.72
V_ROLL_TEMP: P5.5 R64.1
V_TEMP: R42.1 T28.0 U12.G3
VBAT: C1.1 P2.14 P6.13 T1.0 T5.0 U2.1
VGND: P2.16 P6.15 T3.0 T7.0
VPITCH: P4.6 R34.1
VRATEOUT: C79.2 R52.1 T33.0 U12.B1 | length 108.2
  Top Layer w10: C79.2 465.98,1810.53 U12.B1
VREF/2: R47.1 R56.1 R66.1 T44.0 U9.13 U9.14
VROLL: P5.6 R73.1
pads on no net: P2.0 P2.10 P2.12 P4.1 P4.4 P4.5 P5.1 P5.4 P6.0 P6.9 P6.11 U4.1 U4.5 U4.8 U6.1 U6.2 U6.3 U6.4 U6.5 U6.6 U6.9 U6.19 U6.31 U6.32 U6.33 U6.34 U6.37 U6.38 U6.39 U6.40 U6.43 U6.44 U6.45 U6.46 U6.47 U6.48 U6.49 U6.50 U6.55 U6.56 U6.61 U6.62 U6.63 U6.64 U6.66 U6.67 U6.69 U6.74 U7.1 U7.4 U7.9 U7.11 U7.13 U7.16 U7.PAD U8.12 U8.13 U8.14 U8.15 U8.16 U8.17 U8.18 U8.19 U8.33 U8.65 U11.2 U11.7 U11.15 U12.A2 U12.B3 U12.B4 U12.B5 U12.B7 U12.C2 U12.C6 U12.D1 U12.D2 U12.D6 U12.E2 U12.E6 U12.F1 U12.F3 U12.F4 U12.F5 U12.G6 Y2.2
copper on no net:
  other v1: 828.89,755.89 876.13,755.89 923.38,755.89 970.62,755.89 1017.87,755.89 1065.11,755.89 828.89,803.13 876.13,803.13 923.38,803.13 970.62,803.13 1017.87,803.13 1065.11,803.13 828.89,850.38 876.13,850.38 923.38,850.38 970.62,850.38 1017.87,850.38 1065.11,850.38 828.89,897.62 876.13,897.62 923.38,897.62 970.62,897.62 1017.87,897.62 1065.11,897.62 828.89,944.87 876.13,944.87 923.38,944.87 970.62,944.87 1017.87,944.87 1065.11,944.87 828.89,992.11 876.13,992.11 923.38,992.11 970.62,992.11 1017.87,992.11 1065.11,992.11

## Text inside footprints (layer, text, board x,y; h text height)
P4: Top Overlay "4" at 74,508 h50 r90; Top Overlay "1" at 174,528 h50 r90; Top Overlay "3" at 174,888 h50 r90; Top Overlay "6" at 74,888 h50 r90
P5: Top Overlay "4" at 1005,1535 h50 r90; Top Overlay "1" at 1105,1555 h50 r90; Top Overlay "3" at 1105,1915 h50 r90; Top Overlay "6" at 1005,1915 h50 r90